# EAGLE board x-mosfet (EAGLE 4.16)
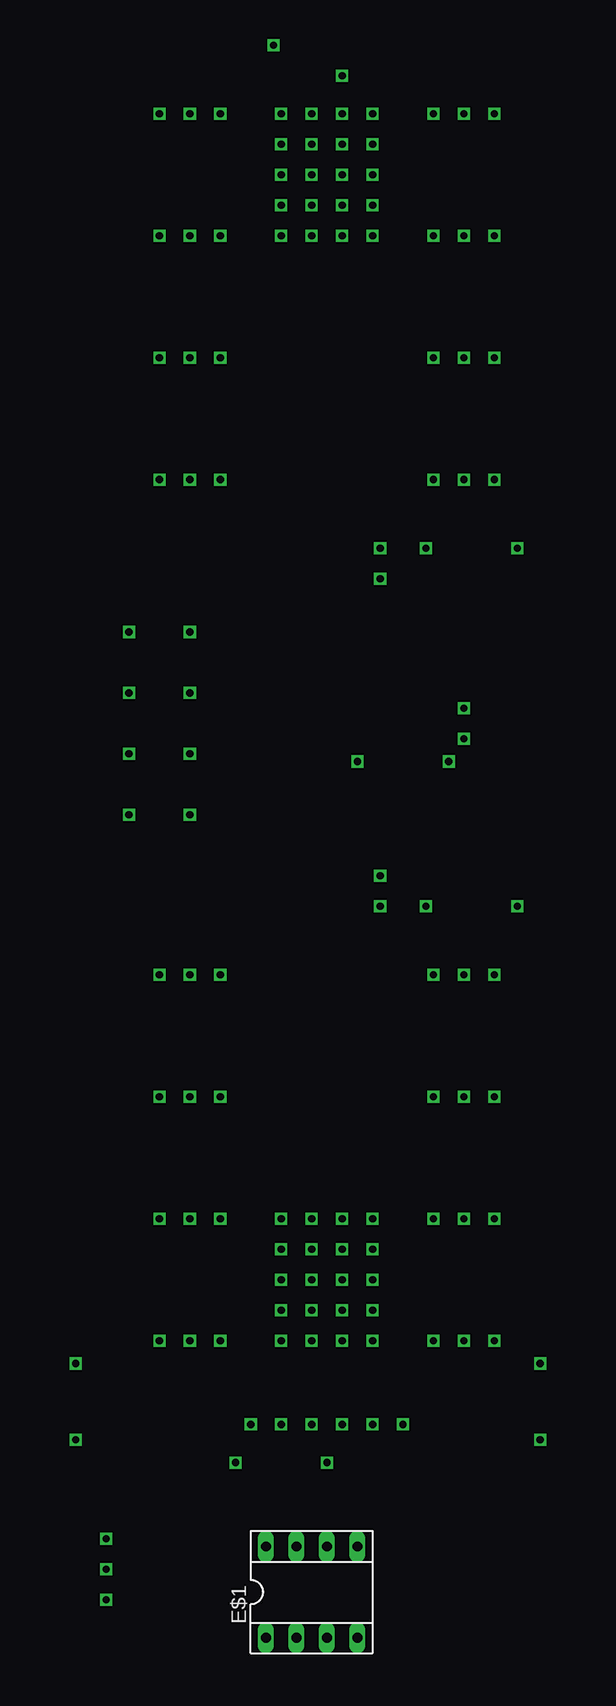
[diagram p0: board, top side]
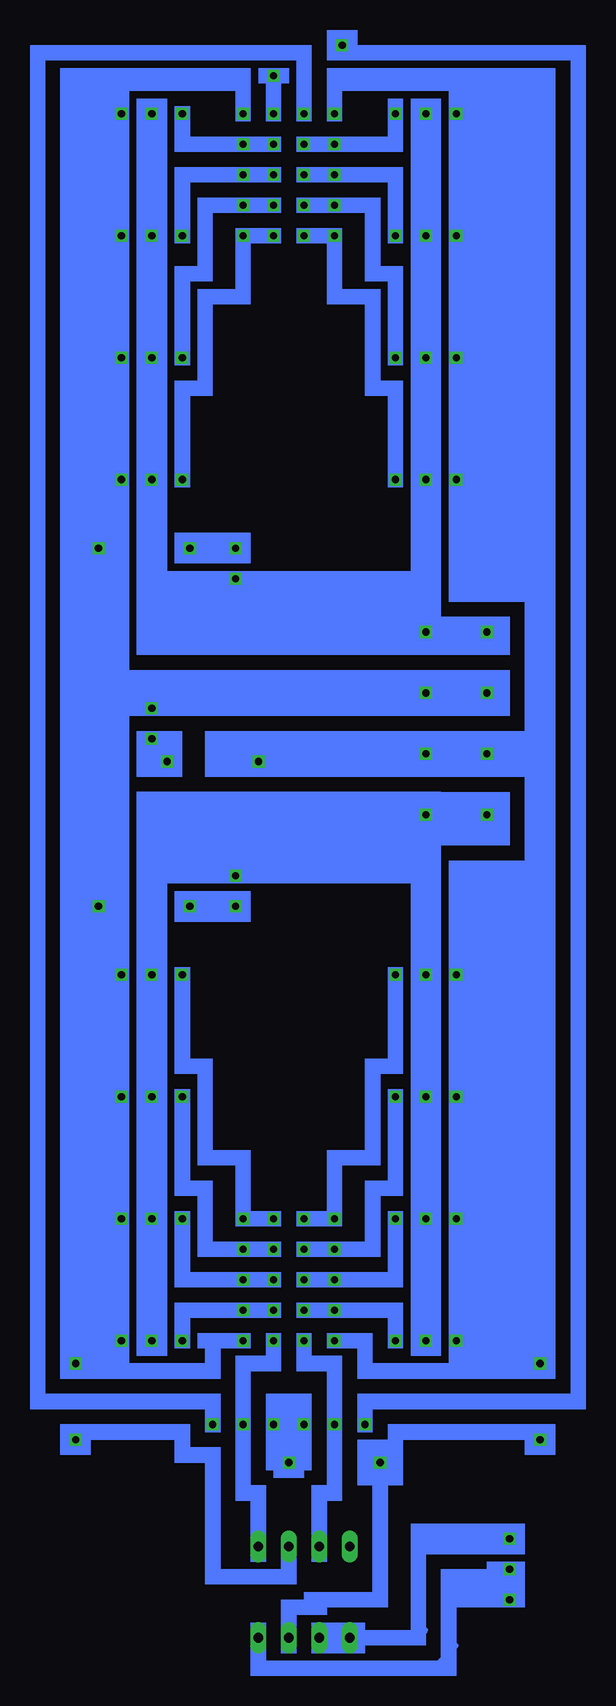
[diagram p1: board, bottom side, seen from below]

No outline drawn. Coordinates in mm, seen from the top.
Copper layers (1*16): Top 0.035mm / dielectric 1.5mm / Bottom 0.035mm
Design rules "default": minimum track width 10mil, minimum drill 24mil, track to track 8mil, track to pad 8mil, pad to pad 8mil, via to via 8mil, smd to smd 8mil, copper to edge 40mil, drill to drill 8mil, minimum pad ring 10mil, minimum via ring 8mil, stop-mask expansion 4mil, vias tented up to drill 0mil, thermal gap 10mil

## Footprints (pad centres in the part's own frame; a part is rotated, then mirrored left to right if it is on the bottom)
SOCKED-08 = drill 0.813 long: 1 -3.81,-3.81; 2 -1.27,-3.81; 3 1.27,-3.81; 4 3.81,-3.81; 5 3.81,3.81; 6 1.27,3.81; 7 -1.27,3.81; 8 -3.81,3.81

## Placement (x,y rotation side)
E$1  [SOCKED-08]  83.19,23.5 0 top

## Library data of the parts
E$1 = ic-package

## Nets
S$73: E$1.4

## Tracks (layer width: path | path; a pad name or v marks a point on that pad's centre or on a via)
S$1  (via drill 0.6)
  other vias: 73.03,98.42
S$2  (via drill 0.6)
  other vias: 73.03,93.34
S$3  (via drill 0.6)
  other vias: 73.03,103.5
S$4  (via drill 0.6)
  other vias: 73.03,88.27
S$5  (via drill 0.6)
  other vias: 67.94,103.5
S$6  (via drill 0.6)
  other vias: 67.94,98.42
S$7  (via drill 0.6)
  other vias: 67.94,93.34
S$8  (via drill 0.6)
  other vias: 67.94,88.27
S$9  (via drill 0.6)
  other vias: 83.19,146.69
S$10  (via drill 0.6)
  other vias: 85.72,146.69
S$11  (via drill 0.6)
  Bottom 0.406: v83.19,44.45 83.19,42.55 81.28,42.55 80.64,41.91 v80.64,37.47 80.64,34.29
S$12  (via drill 0.6)
  Bottom 0.406: v85.72,44.45 85.72,42.55 87.63,42.55 88.27,41.91 v88.27,37.47 88.27,34.29
S$13  (via drill 0.6)
  other vias: 83.19,37.47
S$14  (via drill 0.6)
  Bottom 0.406: 93.34,146.69 93.34,144.15 v88.27,144.15 v85.72,144.15
S$15  (via drill 0.6)
  Bottom 0.406: 70.48,41.91 v70.48,44.45
S$16  (via drill 0.6)
  other vias: 85.72,149.86
S$17  (via drill 0.6)
  other vias: 80.01,152.4
S$18  (via drill 0.6)
  other vias: 88.27,44.45
S$19  (via drill 0.6)
  other vias: 83.19,46.99
S$20  (via drill 0.6)
  other vias: 83.19,49.53
S$21  (via drill 0.6)
  other vias: 83.19,52.07
S$22  (via drill 0.6)
  other vias: 83.19,54.61
S$23  (via drill 0.6)
  other vias: 90.81,37.47
S$24  (via drill 0.6)
  other vias: 85.72,37.47
S$25  (via drill 0.6)
  other vias: 102.23,42.55
S$26  (via drill 0.6)
  other vias: 73.03,146.69
S$27  (via drill 0.6)
  other vias: 70.48,74.93
S$28  (via drill 0.6)
  other vias: 93.34,146.69
S$29  (via drill 0.6)
  other vias: 95.89,146.69
S$30  (via drill 0.6)
  other vias: 78.11,37.47
S$31  (via drill 0.6)
  other vias: 70.48,136.53
S$32  (via drill 0.6)
  other vias: 73.03,136.53
S$33  (via drill 0.6)
  Bottom 0.406: v75.56,136.53 75.56,141.6 v80.64,141.6 v83.19,141.6
S$34  (via drill 0.6)
  other vias: 70.48,126.36
S$35  (via drill 0.6)
  other vias: 73.03,126.36
S$36  (via drill 0.6)
  Bottom 0.406: v75.56,126.36 75.56,133.35 77.47,133.35 77.47,139.06 v80.64,139.06 v83.19,139.06
S$37  (via drill 0.6)
  other vias: 70.48,116.2
S$38  (via drill 0.6)
  other vias: 73.03,116.2
S$39  (via drill 0.6)
  Bottom 0.406: v75.56,116.2 75.56,123.83 77.47,123.83 77.47,131.44 80.64,131.44 v80.64,136.53 v83.19,136.53
S$40  (via drill 0.6)
  Bottom 0.406: v93.34,136.53 93.34,141.6 v88.27,141.6 v85.72,141.6
S$41  (via drill 0.6)
  other vias: 95.89,136.53
S$42  (via drill 0.6)
  other vias: 98.42,136.53
S$43  (via drill 0.6)
  Bottom 0.406: v93.34,126.36 93.34,133.35 91.44,133.35 91.44,139.06 v88.27,139.06 v85.72,139.06
S$44  (via drill 0.6)
  other vias: 95.89,126.36
S$45  (via drill 0.6)
  other vias: 98.42,126.36
S$46  (via drill 0.6)
  Bottom 0.406: v93.34,116.2 93.34,123.83 91.44,123.83 91.44,131.44 88.27,131.44 v88.27,136.53 v85.72,136.53
S$47  (via drill 0.6)
  other vias: 95.89,116.2
S$48  (via drill 0.6)
  other vias: 98.42,116.2
S$49  (via drill 0.6)
  Bottom 0.406: v80.64,146.69 80.64,149.86 70.48,149.86 v70.48,146.69
S$50  (via drill 0.6)
  Bottom 0.406: v75.56,146.69 75.56,144.15 v80.64,144.15 v83.19,144.15
S$51  (via drill 0.6)
  other vias: 73.03,74.93
S$52  (via drill 0.6)
  Bottom 0.406: v75.56,74.93 75.56,67.31 77.47,67.31 77.47,59.69 80.64,59.69 v80.64,54.61
S$53  (via drill 0.6)
  Bottom 0.406: v93.34,74.93 93.34,67.31 91.44,67.31 91.44,59.69 88.27,59.69 v88.27,54.61
S$54  (via drill 0.6)
  Bottom 0.406: v88.27,146.69 88.27,149.86 98.42,149.86 v98.42,146.69
S$55  (via drill 0.6)
  other vias: 95.89,74.93
S$56  (via drill 0.6)
  other vias: 98.42,74.93
S$57  (via drill 0.6)
  other vias: 70.48,64.77
S$58  (via drill 0.6)
  other vias: 73.03,64.77
S$59  (via drill 0.6)
  other vias: 102.23,36.2
S$60  (via drill 0.6)
  other vias: 75.56,64.77
S$61  (via drill 0.6)
  Bottom 0.406: v93.34,64.77 93.34,57.15 91.44,57.15 91.44,52.07 v88.27,52.07
S$62  (via drill 0.6)
  other vias: 95.89,64.77
S$63  (via drill 0.6)
  other vias: 98.42,64.77
S$64  (via drill 0.6)
  other vias: 80.64,44.45
S$65  (via drill 0.6)
  other vias: 70.48,54.61
S$66  (via drill 0.6)
  other vias: 73.03,54.61
S$67  (via drill 0.6)
  Bottom 0.406: v75.56,54.61 75.56,49.53 v80.64,49.53
S$68
  Bottom 0.406: 81.92,19.05 81.92,19.68 73.66,19.68 73.03,20.32
S$69  (via drill 0.6)
  other vias: 73.03,44.45
S$70  (via drill 0.6)
  Bottom 0.406: v75.56,44.45 75.56,46.99 v80.64,46.99
S$71  (via drill 0.6)
  Bottom 0.406: v93.34,44.45 93.34,46.99 v88.27,46.99
S$72  (via drill 0.6)
  other vias: 95.89,44.45
S$73
  Bottom 0.406: E$1.4 87,17.14 72.39,17.14 70.48,19.05
S$74  (via drill 0.6)
  Bottom 0.406: v93.34,54.61 93.34,49.53 v88.27,49.53
S$75  (via drill 0.6)
  other vias: 95.89,54.61
S$76  (via drill 0.6)
  other vias: 98.42,54.61
S$77  (via drill 0.6)
  Bottom 0.406: 98.42,41.91 v98.42,44.45
S$78  (via drill 0.6)
  other vias: 85.72,54.61
S$79  (via drill 0.6)
  other vias: 85.72,52.07
S$80  (via drill 0.6)
  other vias: 85.72,49.53
S$81  (via drill 0.6)
  other vias: 85.72,46.99
S$82  (via drill 0.6)
  other vias: 63.5,36.2
S$83  (via drill 0.6)
  other vias: 63.5,42.55
S$84  (via drill 0.6)
  other vias: 76.83,34.29
S$85  (via drill 0.6)
  other vias: 84.45,34.29
S$86  (via drill 0.6)
  Bottom 0.406: 75.56,64.77 75.56,57.15 77.47,57.15 77.47,52.07 v80.64,52.07
S$87  (via drill 0.6)
  other vias: 66.04,27.94
S$88  (via drill 0.6)
  other vias: 66.04,25.4
S$89  (via drill 0.6)
  other vias: 66.04,22.86
S$90  (via drill 0.6)
  other vias: 87,92.71
S$91  (via drill 0.6)
  other vias: 95.89,97.16
S$92  (via drill 0.6)
  other vias: 100.33,110.49
S$93  (via drill 0.6)
  other vias: 92.71,110.49
S$94  (via drill 0.6)
  other vias: 95.89,94.61
S$95  (via drill 0.6)
  other vias: 94.61,92.71
S$96  (via drill 0.6)
  other vias: 88.9,110.49
S$97  (via drill 0.6)
  other vias: 88.9,80.64
S$98  (via drill 0.6)
  other vias: 88.9,83.19
S$99  (via drill 0.6)
  other vias: 92.71,80.64
S$100  (via drill 0.6)
  other vias: 100.33,80.64
S$101  (via drill 0.6)
  other vias: 88.9,107.95
(copper drawn outside any net)
  shapes: Bottom area x226